# Altium PCB 机载动力寻优.PcbDoc
Units mil, origin at the board's own origin, x right, y up, seen from the top; angles counter-clockwise.
Board outline 4527.56 x 2952.76 mil, 2 copper layers (Top Layer, Bottom Layer); 38 components, 125 nets, 247 pads, 70 vias.
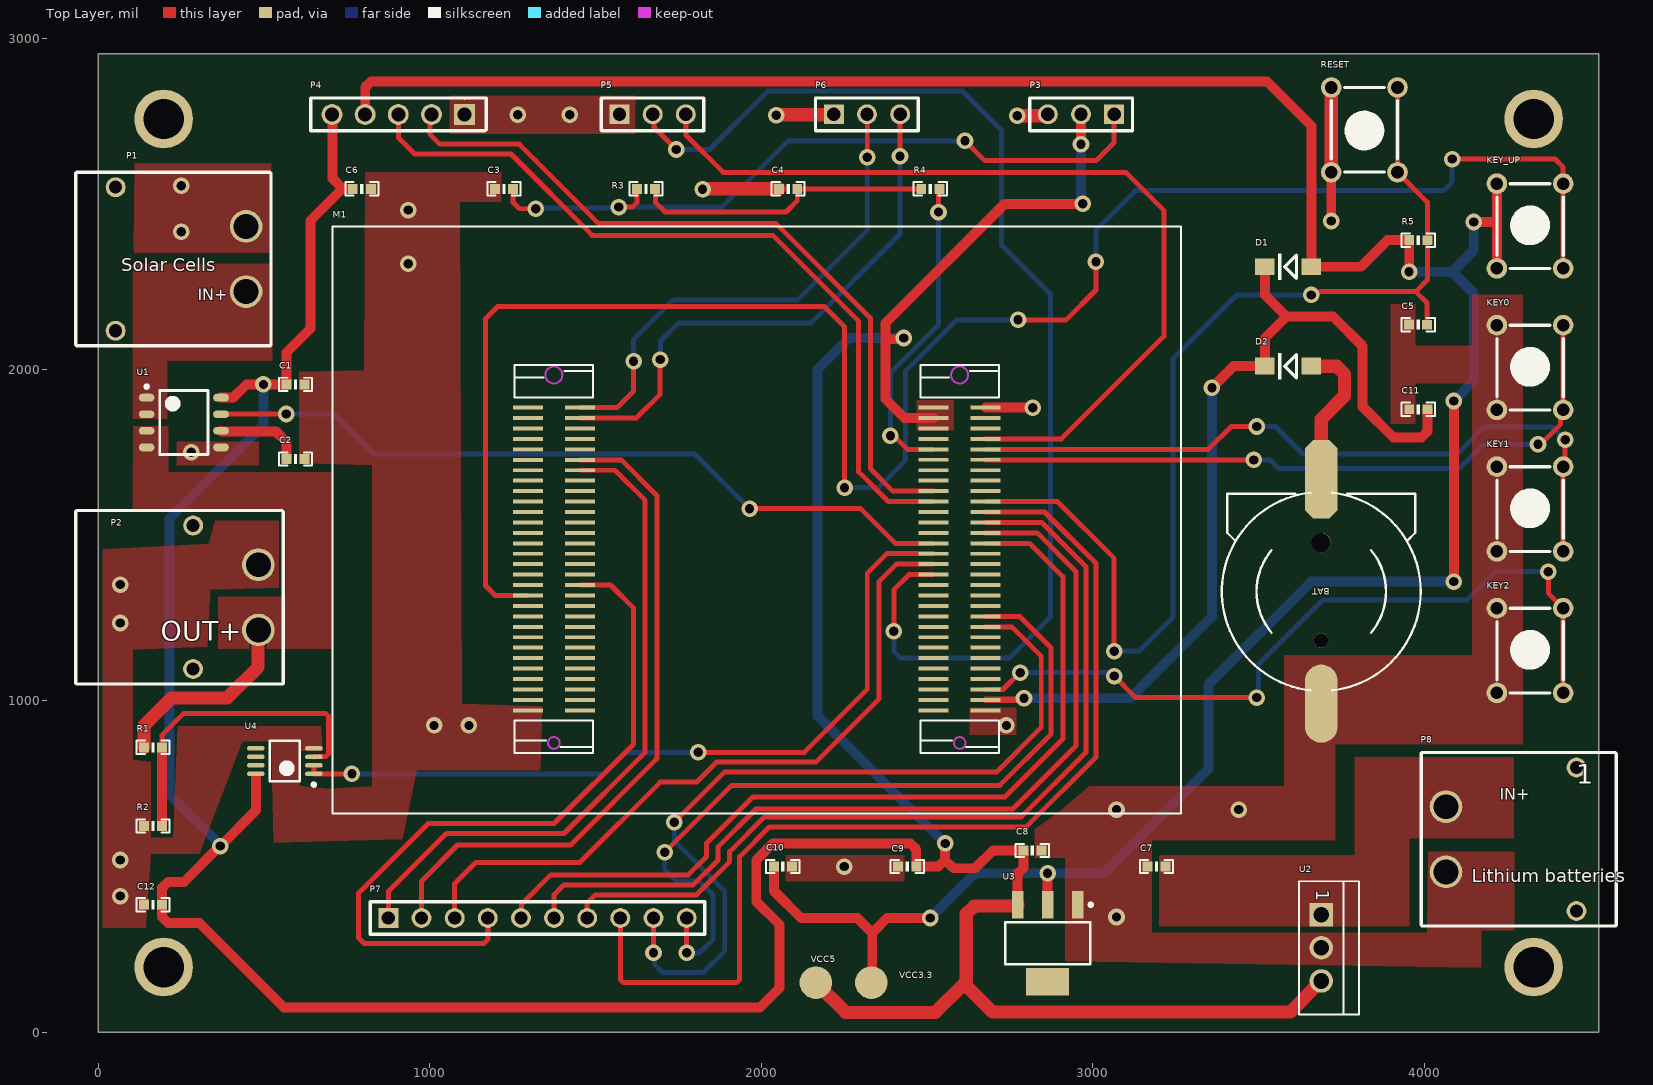
[diagram p0: Top Layer view]
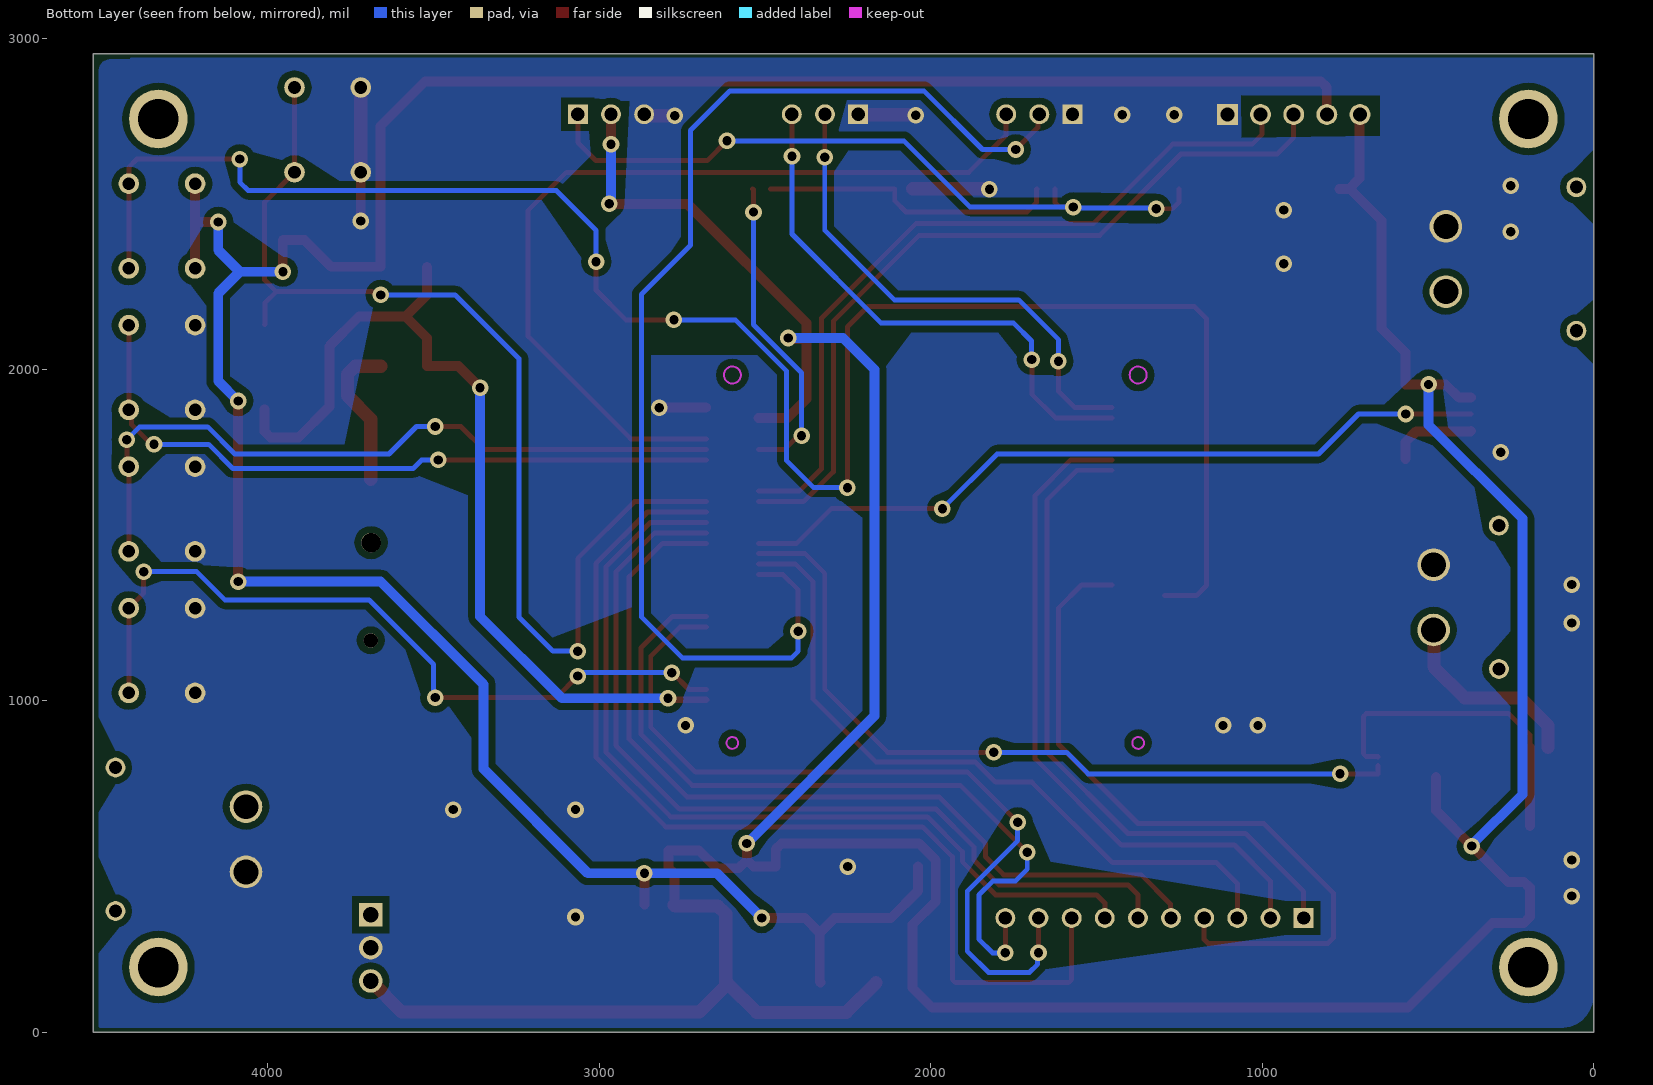
[diagram p1: Bottom Layer view, seen from below]

## Layer stack, top to bottom
Top Solder: solder mask 0.4, Solder Resist, Dk 3.5
Top Layer: signal copper 1.4
Dielectric 1: dielectric 12.6, FR-4, Dk 4.8
Bottom Layer: signal copper 1.4
Bottom Solder: solder mask 0.4, Solder Resist, Dk 3.5

## Board outline
0,0 0,2952.76 4527.56,2952.76 4527.56,0

## Design rules (kind name [scope] priority, off if disabled: settings)
Clearance [All] p1: gap=6 ignorepadtopadclearanceinfootprint=FALSE
FabricationTestpoint [All] p1: side=3 testpointundercomponent=TRUE minsize=40 maxsize=196.85 preferedsize=60 minholesize=0 maxholesize=40 preferedholesize=32 testpointgrid=1 allowsidetop=TRUE allowsidebottom=TRUE usegrid=TRUE gridtolerance=0.01
HoleSize [All] p1: absolutevalues=TRUE maxlimit=200 minlimit=1 maxpercent=80.000 minpercent=20.000
MinimumSolderMaskSliver [All] p1: minsoldermaskwidth=2
PolygonConnect [All] p1: connectstyle=Direct reliefconductorwidth=10 reliefentries=4 polygonreliefangle="90 Angle" airgapwidth=10
RoutingVias [All] p1: holewidth=28 width=50 viastyle="Through Hole" minholewidth=28 minwidth=50 maxholewidth=28 maxwidth=50
SilkToSilkClearance [All] p1: silktosilkclearance=4
SilkToSolderMaskClearance [IsPad] p1: minsilkscreentomaskgap=2 clearancetoexposedcopper=TRUE
SolderMaskExpansion [All] p1: expansion=4 istentingtop=FALSE
Width PWR [InNetClass('PWR')] p1: maxlimit=60 minlimit=20 preferedwidth=30
Width [All] p2: maxlimit=60 minlimit=15 preferedwidth=15
25 further rules are at their usual default settings.

## Classes and differential pairs
net class PWR: GND VBAT VCC3.3 VCC5 VREF+
component class 机载动力寻优: BAT C1 C3 C4 C5 C6 C8 C9 C10 C11 C12 D1 D2 KEY0 KEY1 KEY2 KEY_UP M1 P1 P3 P4 P5 P6 P7 P8 R1 R2 R3 R4 R5 RESET U2 U3 U4

## Components (designator, comment, footprint, x,y, rotation, side; value= is the part's Value field where it differs from the comment)
BAT "BATT" BATM 3690,1330 r180 top
C1 "0.1uF" 0603P 595,1955 r180 top
C2 "1nF" 0603P 595,1730 r180 top
C3 "100pF" 0603P 1223.75,2545.13 r0 top
C4 "1000pF" 0603P 2081.25,2545.13 r0 top
C5 "100nF" 0603P 3982.5,2135.03 r180 top
C6 "100nF" 0603P 795,2545 r180 top
C7 "0.33uF" 0603P 3192.5,499.94 r180 top
C8 "0.1uf" 0603P 2818,549 r0 top
C9 "10uF" 0603P 2440.83,499.94 r180 top
C10 "22uF" 0603P 2065,500.06 r0 top
C11 "100nF" 0603P 3982.5,1880 r0 top
C12 "0.1uF" 0603P 165,385 r0 top
D1 "1N4148" DIODE_SOP 3660,2310 r180 top
D2 "1N4148" DIODE_SOP 3660,2010 r180 top
KEY0 "KEY_M" KEY_M 4220,1878.03 r90 top
KEY1 "KEY_M" KEY_M 4220,1451.06 r90 top
KEY2 "KEY_M" KEY_M 4220,1024.09 r90 top
KEY_UP "KEY_M" KEY_M 4220,2305 r90 top
M1 "STM32F4&F7_CB" STM32F4&F7_CB 2677.48,1885 r180 top
P1 "XT30PW-M" XT30PW-M 445.7,2333.46 r90 top
P2 "XT30PW-F" XT30PW-F 482.85,1312.46 r90 top
P3 "Header 3" 串口 2965,2770 r180 top
P4 "Header 5" 串口数据记录仪 905,2769.21 r180 top
P5 "Header 3" 串口 1672.57,2770 r0 top
P6 "Header 3" 串口 2319.24,2770 r0 top
P7 "Header 10" IO口 1325,345 r0 top
P8 "XT30M-Bat" XT30PW-M 4066.3,582.46 r270 top
R1 "9K" 0603P 165,860 r0 top
R2 "1K" 0603P 165,622.44 r180 top
R3 "47K" 0603P 1652.5,2545.13 r0 top
R4 "4.7K" 0603P 2510,2545.13 r0 top
R5 "10K" 0603P 3982.5,2390.06 r0 top
RESET "KEY_M" KEY_M 3920,2850.91 r270 top
U1 "ACS712" ACS712 257.8,1840 r0 top
U2 "L7805CV" TO-220-3 3690,255 r270 top
U3 "AMS1117-3.3" SOT-223 2864.45,268.86 r270 top
U4 "OPA" OPA 562.6,818.39 r180 top

## Footprints (in the part's own frame and the unit in brackets; to place one, negate y for a bottom-side part, rotate by r counter-clockwise, add the part's x,y. Pads: shape width x height; smd on the part's side, far side on the other; paste and mask are expansions set on the pad)
0603P [mil]
  rect 30x30 smd: 1(-27,0) 2(27.5,-0.06)
  silkscreen extent -50,-20 50,20
ACS712 [mm] "SOIC, 8-Leads, Body 4.90x3.90mm, Pitch 1.27mm, IPC Medium Density"
  oval 1.2x0.6 smd: 1(-2.85,1.905) 2(-2.85,0.635) 3(-2.85,-0.635) 4(-2.85,-1.905) 5(2.85,-1.905) 6(2.85,-0.635) 7(2.85,0.635) 8(2.85,1.905)
  silkscreen extent -2.97,-2.45 1.85,2.88, body extent -1.95,-2.45 1.95,2.45, height 1.62
BATM [mm]
  round 1.1 hole 1.1 unplated: 0(0,3.748)
  round 1.5 hole 1.5 unplated: 0(0.025,-3.752)
  oct 2.5x6 smd: 1(0,-8.602)
  oval 2.5x6 smd: 2(0,8.598)
  silkscreen extent -7.62,-7.58 7.62,7.57
DIODE_SOP [mm]
  rect 1.5x1.3 smd: 1(0,0) 2(3.556,0)
  silkscreen extent 1.14,-1.02 2.56,1.02
IO口 [mil]
  rect 60x60 hole 40.16: 1(-450,0)
  round 60 hole 40.16: 2(-350,0) 3(-250,0) 4(-150,0) 5(-50,0) 6(50,0) 7(150,0) 8(250,0) 9(350,0) 10(450,0)
  silkscreen extent -505,-49 504,49
KEY_M [mil]
  round 62 hole 38: 1(0,0) 1(255.91,0) 2(0,-200) 2(255.91,-200)
  silkscreen extent 0,-200 255,0
OPA [mm] "TSOP, 8-Leads, Body 3.00x3.00mm, Pitch 0.65mm, IPC Medium Density"
  oval 1.35x0.35 smd: 1(-2.225,0.975) 2(-2.225,0.325) 3(-2.225,-0.325) 4(-2.225,-0.975) 5(2.225,0.975) 6(2.225,0.325) 7(2.225,-0.325) 8(2.225,-0.975)
  silkscreen extent -2.35,-1.55 1.15,1.92, body extent -1.55,-1.55 1.55,1.55, height 1.1
SOT-223 [mm] "SOT223, 4-Leads, Body 6.20x7.00mm (avg), Pitch 2.30mm, IPC Medium Density"
  rect 2.1x0.9 smd: 1(-2.95,2.3) 2(-2.95,0) 3(-2.95,-2.3)
  rect 2.1x3.3 smd: 4(2.95,0)
  silkscreen extent -3.07,-3.25 1.6,3.43, body extent -3.5,-3.25 3.5,3.25, height 1.8
STM32F4&F7_CB [mm]
  rect 2.3x0.3 smd: J1_1(0,0) J1_2(0,0.8) J1_3(0,1.6) J1_4(0,2.4) J1_5(0,3.2) J1_6(0,4) J1_7(0,4.8) J1_8(0,5.6) J1_9(0,6.4) J1_10(0,7.2) J1_11(0,8) J1_12(0,8.8) J1_13(0,9.6) J1_14(0,10.4) J1_15(0,11.2) J1_16(0,12) J1_17(0,12.8) J1_18(0,13.6) J1_19(0,14.4) J1_20(0,15.2) J1_21(0,16) J1_22(0,16.8) J1_23(0,17.6) J1_24(0,18.4) J1_25(0,19.2) J1_26(0,20) J1_27(0,20.8) J1_28(0,21.6) J1_29(0,22.4) J1_30(0,23.2) J1_31(4,23.2) J1_32(4,22.4) J1_33(4,21.6) J1_34(4,20.8) J1_35(4,20) J1_36(4,19.2) J1_37(4,18.4) J1_38(4,17.6) J1_39(4,16.8) J1_40(4,16) J1_41(4,15.2) J1_42(4,14.4) J1_43(4,13.6) J1_44(4,12.8) J1_45(4,12) J1_46(4,11.2) J1_47(4,10.4) J1_48(4,9.6) J1_49(4,8.8) J1_50(4,8) J1_51(4,7.2) J1_52(4,6.4) J1_53(4,5.6) J1_54(4,4.8) J1_55(4,4) J1_56(4,3.2) J1_57(4,2.4) J1_58(4,1.6) J1_59(4,0.8) J1_60(4,0) J2_1(31.1,0.001) J2_2(31.1,0.801) J2_3(31.1,1.601) J2_4(31.1,2.401) J2_5(31.1,3.201) J2_6(31.1,4.001) J2_7(31.1,4.801) J2_8(31.1,5.601) J2_9(31.1,6.401) J2_10(31.1,7.201) J2_11(31.1,8.001) J2_12(31.1,8.801) J2_13(31.1,9.601) J2_14(31.1,10.401) J2_15(31.1,11.201) J2_16(31.1,12.001) J2_17(31.1,12.801) J2_18(31.1,13.601) J2_19(31.1,14.401) J2_20(31.1,15.201) J2_21(31.1,16.001) J2_22(31.1,16.801) J2_23(31.1,17.601) J2_24(31.1,18.401) J2_25(31.1,19.201) J2_26(31.1,20.001) J2_27(31.1,20.801) J2_28(31.1,21.601) J2_29(31.1,22.401) J2_30(31.1,23.201) J2_31(35.1,23.201) J2_32(35.1,22.401) J2_33(35.1,21.601) J2_34(35.1,20.801) J2_35(35.1,20.001) J2_36(35.1,19.201) J2_37(35.1,18.401) J2_38(35.1,17.601) J2_39(35.1,16.801) J2_40(35.1,16.001) J2_41(35.1,15.201) J2_42(35.1,14.401) J2_43(35.1,13.601) J2_44(35.1,12.801) J2_45(35.1,12.001) J2_46(35.1,11.201) J2_47(35.1,10.401) J2_48(35.1,9.601) J2_49(35.1,8.801) J2_50(35.1,8.001) J2_51(35.1,7.201) J2_52(35.1,6.401) J2_53(35.1,5.601) J2_54(35.1,4.801) J2_55(35.1,4.001) J2_56(35.1,3.201) J2_57(35.1,2.401) J2_58(35.1,1.601) J2_59(35.1,0.801) J2_60(35.1,0.001)
  Keep-Out Layer circle w0.152: c33.1,25.701 r0.45
  Keep-Out Layer circle w0.152: c33.1,-2.499 r0.65
  Keep-Out Layer circle w0.152: c2,-2.5 r0.65
  Keep-Out Layer circle w0.152: c2,25.7 r0.45
  silkscreen extent -14.95,-13.87 50.05,31.13
TO-220-3 [mm]
  rect 1.8x1.8 hole 1.2: 1(-2.54,0)
  round 1.8 hole 1.2: 2(0,0) 3(2.54,0)
  silkscreen extent -5.1,-1.7 5.1,2.9
XT30PW-F [mm]
  round 2.5 hole 1.9: 1(-2.5,0) 2(2.5,0)
  round 1.524 hole 1: ""(-5.489,5.005) ""(5.5,5)
  silkscreen extent -6.64,-1.91 6.65,14
XT30PW-M [mm]
  round 2.5 hole 1.9: 1(-2.5,0) 2(2.5,0)
  round 1.524 hole 1: ""(-5.5,10) ""(5.5,10)
  silkscreen extent -6.65,-1.91 6.65,13.05
串口 [mil]
  rect 60x60 hole 40.16: 1(-100,0)
  round 60 hole 40.16: 2(0,0) 3(100,0)
  silkscreen extent -155,-49 154,49
串口数据记录仪 [mm]
  rect 1.6x1.6 hole 1.07: 1(-5.08,0)
  round 1.6 hole 1.07: 2(-2.54,0) 3(0,0) 4(2.54,0) 5(5.08,0)
  silkscreen extent -6.73,-1.27 6.71,1.25

## Part data
BAT: library part BAT, "电源"
C1 C2 C3 C4 C5 C6 C11: library part C
C7 C8 C9 C10 C12: library part CAP, "电容"
D1 D2: library part D, "二极管"
M1: "F429/746 Core Board"
P3 P5 P6: "Header, 3-Pin", LatestRevisionDate=17-Jul-2002, LatestRevisionNote="Re-released for DXP Platform.", Publisher="Altium Limited"
P4: "Header, 5-Pin", LatestRevisionDate=17-Jul-2002, LatestRevisionNote="Re-released for DXP Platform.", Publisher="Altium Limited"
P7: "Header, 10-Pin", LatestRevisionDate=17-Jul-2002, LatestRevisionNote="Re-released for DXP Platform.", Publisher="Altium Limited"
P8: library part XT30, "公头"
R1 R2 R3 R4 R5: library part R
U2 U3: "IC"
U4: "运放器"

## Free pads (board coordinates)
  round 177.17 hole 122.05: 14(196.85,196.85) 14(196.85,2755.91) 14(4330.71,196.85) 14(4330.71,2755.91)
  round 98.43 smd: 18(2332.5,150) 19(2165,150)

## Via types
v1: diameter 50, hole 28, Top Layer to Bottom Layer, 70 vias

## Nets (pads, with @x,y where several pads share a name; then routed paths per layer and width w, separated by ;. In a path a pad name is that pad's centre, name@x,y a point inside that pad or via, vN(x,y) a via of type N, cw(c..) or ccw(c..) an arc to the next point about the centre after c; other vN are vias at no path point)
1WIRE_DQ: M1.J2_4
BOOT0: M1.J1_31
BOOT1: M1.J1_55
DCMI_D0: M1.J2_16
DCMI_D1: M1.J2_17
DCMI_D2: M1.J2_18 P7.4 | length 2219.1
  Top Layer w15: P7.4 1175,280 1163,268 802,268 785,285 785,420 995,630 1375,630 1615,870 1615,1280 1545.47,1349.53 M1.J2_18
DCMI_D3: M1.J2_19
DCMI_D4: M1.J1_39
DCMI_D5: M1.J1_36
DCMI_D6: M1.J1_26
DCMI_D7: M1.J1_27
DCMI_HREF: M1.J2_3
DCMI_PCLK: M1.J1_47 U1.7 | length 2311.9
  Top Layer w15: U1.7 566.25,1865 v1(567,1865.75) ; v1(1965,1580) 2300,1580 2404.45,1475.55 M1.J1_47
  Bottom Layer w15: v1(567,1865.75) 709.25,1865.75 830,1745 1800,1745 v1(1965,1580)
DCMI_RESET: M1.J1_41
DCMI_SCL: M1.J1_22 P7.9 | length 2486.3
  Top Layer w15: v1(1675,240) P7.9 ; v1(1738,634) 1889,785 2710,785 2845,920 2845,1135 2756.42,1223.58 M1.J1_22
  Bottom Layer w15: v1(1675,240) 1677.59,237.41 1677.59,205.41 1702,181 1826,181 1890,245 1890,426 1738,578 v1(1738,634)
DCMI_SDA: M1.J1_21 P7.10 | length 2374.8
  Top Layer w15: v1(1709,543) 1911,745 2720,745 2875,900 2875,1159.5 2779.42,1255.08 M1.J1_21 ; v1(1775,240) P7.10
  Bottom Layer w15: v1(1709,543) 1709,492 1745,456 1813.08,456 1855,414.08 1855,281 1814,240 v1(1775,240)
DCMI_VSYNC: M1.J1_25
DCMI_XCLK: M1.J2_20
ETH_MDC: M1.J1_9
ETH_MDIO: M1.J1_4 P5.3 | length 2644.9
  Top Layer w15: P5.3 1772.57,2707.43 1885,2595 3100,2595 3215,2480 3215,2100 2905.51,1790.51 M1.J1_4
FMC_A16_CLE: M1.J2_23
FMC_A17_ALE: M1.J2_21
FMC_A18: M1.J2_14
FMC_D0: M1.J2_45
FMC_D1: M1.J2_46
FMC_D2: M1.J2_47
FMC_D3: M1.J2_48
FMC_D4: M1.J2_49
FMC_D5: M1.J2_50
FMC_D6: M1.J2_51
FMC_D7: M1.J2_52
FMC_D8: M1.J2_53
FMC_D9: M1.J2_54
FMC_D10: M1.J2_55
FMC_D11: M1.J2_56
FMC_D12: M1.J2_57
FMC_D13: M1.J2_58
FMC_D14: M1.J2_59
FMC_D15: M1.J2_60
FMC_NBL0: M1.J2_43
FMC_NBL1: M1.J2_44
FMC_NE1: M1.J1_35
FMC_NOE: M1.J2_26
FMC_NWAIT: M1.J2_27
FMC_NWE: M1.J2_22
GBC_KEY: M1.J1_15
GBC_LED: M1.J1_45 P7.3 | length 2156.1
  Top Layer w15: P7.3 1075,449 1137.81,511.81 1451.81,511.81 1695,755 1805,755 1865,815 2165,815 2355,1005 2355,1360 2407.56,1412.56 M1.J1_45
GND: BAT.2 C1.1 C2.1 C3.1 C4.1 C5.2 C6.1 C7.2 C8.2 C9.2 C10.2 C11.1 C12.1 KEY0.1 KEY1.1 KEY2.1 M1.J1_1 M1.J1_30 M1.J2_31 P1.2 P2.2 P3.3 P4.1 P5.1 P6.1 P8.2 R2.2 RESET.2 U1.5 U2.2 U3.1 U4.4 | length 1047.5
  Top Layer w30: v1(1823,2544) cw(c1825.72,2541.28) v1@1825.72,2545.13 ; M1.J1_1 2818.82,1885 v1(2819.41,1884.41) ; v1(3720,2448) RESET.2@3720,2595
  Top Layer w40: v1@1825.72,2545.13 C4.1 ; v1(2045.55,2767.45) 2046.83,2768.72 2217.96,2768.72 P6.1 ; v1(2773,2766) 2855,2766 2858,2763 P3.3 ; RESET.2@3720,2595 RESET.2@3720,2850.91
  other v1: 3072,348 66,411 2251,500 66,520 3072,672 3441,672 1013,926 1118,926 2740,926 66,1235 66,1351 280,1750 935,2319 250,2416 935,2481 250,2554 1265,2769 1422,2769
IIC_SCL: M1.J1_8
IIC_SDA: M1.J1_7
IP+: P1.1 U1.1 U1.2
IP-: P2.1 R1.1 U1.3 U1.4 | length 595.3
  Top Layer w15: P2.1@482,1213.19 P2.1
  Top Layer w40: R1.1 138,926 221,1009 389,1009 482,1102 P2.1@482,1213.19
JTCK: M1.J1_42
JTMS: M1.J1_43
KEY0: KEY0.2 M1.J1_6 | length 2103.8
  Top Layer w15: M1.J1_6 3485.48,1727.52 v1(3486,1727) ; v1(4344,1774) 4351.9,1774 4411.19,1833.29 4411.19,1869.22 4420,1878.03 KEY0.2@4420,2133.94
  Bottom Layer w15: v1(3486,1727) 3486.09,1726.91 3536.09,1726.91 3562,1701 4106,1701 4179,1774 v1(4344,1774)
KEY1: KEY1.2 M1.J1_5 | length 2201
  Top Layer w15: M1.J1_5 3349.02,1759.02 3418,1828 v1(3495,1828) ; KEY1.2@4420,1451.06 4420,1706.97 4426,1712.97 v1(4426,1788)
  Bottom Layer w15: v1(3495,1828) 3552,1828 3635,1745 4100,1745 4182,1827 4387,1827 v1(4426,1788)
KEY2: KEY2.2 M1.J1_28 | length 2347.1
  Top Layer w15: M1.J1_28 2729.61,1034.61 2780,1085 v1(2782,1085) ; v1(3065,1075) 3130,1010 v1(3495,1010) ; v1(4375,1390) 4375,1325 4420,1280 KEY2.2@4420,1024.09
  Bottom Layer w15: v1(2782,1085) 3045.53,1085 3055.53,1075 v1(3065,1075) ; v1(3495,1010) 3500.02,1015.02 3500.02,1110.02 3695,1305 4130,1305 4215,1390 v1(4375,1390)
LCD_B3: M1.J2_35
LCD_B4: M1.J2_36
LCD_B5: M1.J2_37
LCD_B6: M1.J2_38
LCD_B7: M1.J2_39
LCD_BL: M1.J1_23
LCD_G2: M1.J2_30
LCD_G3: M1.J2_29
LCD_G4: M1.J2_28
LCD_G5: M1.J2_34
LCD_G6: M1.J2_33
LCD_G7: M1.J2_32
LCD_R3: M1.J2_10
LCD_R4: M1.J2_11
LCD_R5: M1.J2_12
LCD_R6: M1.J2_24
LCD_R7: M1.J2_15
LED0: M1.J1_57
LED1: M1.J1_56 R4.2 | length 953.1
  Top Layer w15: v1(2390,1800) 2400,1800 2440.98,1759.02 M1.J1_56 ; v1(2535,2475) 2535,2542.56 R4.2
  Bottom Layer w15: v1(2390,1800) 2390,1990 2535,2135 v1(2535,2475)
NetBAT_1: BAT.1 D2.1 | length 456.6
  Top Layer w40: D2.1 3736.57,2010 3760,1986.57 3760,1920 3690,1850 BAT.1
NetC2_2: C2.2 U1.6 | length 262.7
  Top Layer w30: U1.6 371.5,1813.5 535.28,1813.5 567.5,1781.28 C2.2
NetC3_2: C3.2 P3.1 R3.1 | length 2182.1
  Top Layer w15: C3.2 1251.25,2504.46 1270.71,2485 v1(1320,2485) ; v1(1570,2490) 1610.98,2490 1625.5,2504.52 R3.1 ; v1(2615,2690) 2675,2630 3010,2630 3065,2685 P3.1
  Bottom Layer w15: v1(1320,2485) 1322.5,2487.5 1567.5,2487.5 v1(1570,2490) 1881.21,2490 2081.21,2690 v1(2615,2690)
NetC4_2: C4.2 R3.2 R4.1 | length 905.8
  Top Layer w15: R3.2 1680.59,2544.47 1680.59,2504.41 1710,2475 2075,2475 2108.75,2508.75 C4.2 ; C4.2 R4.1
NetC7_1: C7.1 P8.1 U2.1
NetR1_2: R1.2 R2.1 U4.3 | length 968.8
  Top Layer w15: R1.2 192.5,897.5 256.5,961.5 686.21,961.5 695,952.71 695,840.58 686.21,831.79 650.81,831.79 U4.3
  Top Layer w30: R2.1 192.5,622.94 R1.2
NRF_CE: M1.J2_25
NRF_CS: M1.J1_34
PA0: KEY_UP.2 M1.J2_42 | length 5753.5
  Top Layer w15: M1.J2_42 1197.97,1318.03 1168,1348 1168,2153 1205,2190 2190,2190 2251.48,2128.52 v1(2251.48,1643.52) ; v1(2775,2150) 2920,2150 3010,2240 v1(3010,2325) ; v1(4085,2635) 4395,2635 4420,2610 4420,2560.91 KEY_UP.2@4420,2305
  Bottom Layer w15: v1(2251.48,1643.52) 2353.52,1643.52 2435,1725 2435,1995 2590,2150 v1(2775,2150) ; v1(3010,2325) 3010,2420 3130,2540 4060,2540 4085,2565 v1(4085,2635)
PA1: M1.J1_3
PA3: M1.J1_44 P5.2 | length 3626.5
  Top Layer w15: P5.2 1677.22,2765.35 1677.22,2730.4 v1(1743.81,2663.81) ; v1(2400,1210) 2400,1335 2446.06,1381.06 M1.J1_44
  Bottom Layer w15: v1(1743.81,2663.81) 1843.81,2663.81 2021,2841 2605.75,2841 2725,2721.75 2725,2375 2873.5,2226.5 2873.5,1253.5 2750,1130 2420,1130 2400,1150 v1(2400,1210)
PA5: M1.J1_46 U4.1 U4.2 | length 2375.5
  Top Layer w15: U4.2 U4.1 v1(765,780) ; v1(1810,845) 2130,845 2320,1035 2320,1385 2379.06,1444.06 M1.J1_46
  Bottom Layer w15: v1(765,780) 1525,780 1590,845 v1(1810,845)
PA7: M1.J1_48
PA9: M1.J1_51 P4.3 | length 2405.7
  Top Layer w15: P4.3 905,2700 955,2650 1245,2650 1490,2405 2035,2405 2294,2146 2294,1691 2383.46,1601.54 M1.J1_51
PA10: M1.J1_52 P4.2 | length 2293.9
  Top Layer w15: P4.2 1000,2764.21 1000,2710 1030,2680 1270,2680 1320,2630 1510,2440 2045,2440 2330,2155 2330,1700 2396.97,1633.03 M1.J1_52
PA11: M1.J1_53
PA12: M1.J1_54
PB6: M1.J1_24
PB10: M1.J2_2 P6.3 | length 1656.1
  Top Layer w15: M1.J2_2 1623.47,1853.47 1695,1925 v1(1695,2030) ; v1@2418.75,2638.53 2418.75,2769.51 P6.3
  Bottom Layer w15: v1(1695,2030) 1696.09,2031.09 1696.09,2086.09 1750,2140 2150,2140 2418.75,2408.75 v1(2418.75,2643.75)
PB11: M1.J2_1 P6.2 | length 1530.1
  Top Layer w15: M1.J2_1 M1.J2_1 1565,1885 1615,1935 v1(1615,2025) ; P6.2 2320,2769.24 v1(2320,2640)
  Bottom Layer w15: v1(1615,2025) 1614.39,2025.61 1614.39,2089.39 1735,2210 2110,2210 2320,2420 v1(2320,2640)
PB13: M1.J2_5
PB14: M1.J2_6 P7.2 | length 2045.4
  Top Layer w15: P7.2 975,456.21 1083.79,565 1425,565 1685,825 1685,1620 1577.52,1727.48 M1.J2_6
PB15: M1.J2_7 P7.1 | length 2023.6
  Top Layer w15: P7.1 875,425 1050,600 1405,600 1650,845 1650,1605 1559.01,1695.99 M1.J2_7
PC4: M1.J1_49
PC5: M1.J1_50
PC10: M1.J1_40
PC12: M1.J1_38
PD2: M1.J1_37
PE2: M1.J1_20
PE3: M1.J1_19
PE4: M1.J1_18
PE5: M1.J1_17
PE6: M1.J1_16
PF6: M1.J1_14 P7.5 | length 2669.7
  Top Layer w15: P7.5 1277.12,347.12 1277.12,387.12 1365,475 1780,475 1835,530 1835,570 1975,710 2735,710 2910,885 2910,1375 2809.45,1475.55 M1.J1_14
PF7: M1.J1_13 P7.6 | length 2700.7
  Top Layer w15: P7.6 1375,415 1405,445 1795,445 1870,520 1870,559.7 1984.3,674 2759,674 2950,865 2950,1390 2832.95,1507.05 M1.J1_13
PF8: M1.J1_12 P7.7 | length 2673.9
  Top Layer w15: P7.7 1475,390 1500,415 1805,415 1905,515 1905,545 2010,650 2785,650 2980,845 2980,1405 2846.46,1538.54 M1.J1_12
PF9: M1.J1_11 P7.8 | length 3105.7
  Top Layer w15: P7.8 1575,158.79 1583.79,150 1926.21,150 1935,158.79 1935,530 2025,620 2800,620 3010,830 3010,1415 2854.96,1570.04 M1.J1_11
PG3: M1.J2_13
PG13: M1.J1_33
PG14: M1.J1_32
PH6: M1.J2_8
PH7: M1.J2_9
PI3: M1.J2_41
PI8: M1.J2_40
RESET: C5.1 M1.J1_10 R5.2 RESET.1 | length 3337.6
  Top Layer w15: M1.J1_10 2893.46,1601.54 3065,1430 v1(3065,1150) ; v1(3660,2225) 3666.7,2231.7 3682.98,2231.7 3686.29,2235 3975,2235 ; RESET.1@3920,2850.91 3920,2595 4010,2505 R5.2 4010,2270 3975,2235 ; C5.1@4010,2135.53 C5.1 4009.5,2200.5 3975,2235
  Bottom Layer w15: v1(3065,1150) 3140,1150 3243.15,1253.15 3243.15,2033.15 3435,2225 v1(3660,2225)
VBAT: C11.2 D1.2 D2.2 M1.J1_29 | length 2775.4
  Top Layer w20: M1.J1_29 2788.11,1003.11 v1(2793,1008)
  Top Layer w30: v1(3360,1945) 3425,2010 D2.2 3520,2095 3585,2160 ; D1.2 3520,2225 3585,2160 ; C11.2 4010,1812.57 3992.43,1795 3907.43,1795 3815,1887.43 3815,2070 3725,2160 3585,2160
  Bottom Layer w30: v1(2793,1008) 3113,1008 3360,1255 v1(3360,1945)
VCC3.3: C10.1 D1.1 KEY_UP.1 P4.4 pad.18 R5.1 U3.2 | length 8495.2
  Top Layer w30: P4.4 805.2,2769.41 805.2,2851.43 822.77,2869 3526,2869 3660,2735 D1.1 3810,2310 3890.06,2390.06 R5.1 3955.5,2295.5 v1(3955,2295) ; C10.1 2038,427 2120,345 2290,345 2335,300 ; pad.18 2335,152.5 2335,300 ; v1(2510,345) 2380,345 2335,300 ; U3.2 2864,385.45 v1(2864,480) 2864,467 v1@2865,466 ; v1(4090,1360) v1(4090,1905) ; v1(4150,2445) 4220,2445 ; KEY_UP.1@4220,2305 4220,2445 ; KEY_UP.1@4220,2560.91 4220,2445
  Bottom Layer w30: v1(2510,345) 2645,480 3035,480 3350,795 3350,1050 3660,1360 v1(4090,1360) ; v1(3955,2295) 4085,2295 ; v1(4090,1905) 4150,1965 4150,2230 4085,2295 ; v1(4150,2445) 4150,2360 4085,2295
VCC5: C1.2 C6.2 C8.1 C9.1 C12.2 M1.J1_58 M1.J1_59 M1.J1_60 P3.2 P4.5 pad.19 U1.8 U2.3 U3.3 U4.5 | length 12264.9
  Top Layer w30: U1.8 407,1915 447,1955 v1(498,1955) ; 475,770 475,669 v1(368,562) 366,562 258,454 210.07,454 192.5,436.43 C12.2 192.5,347.57 210.07,330 305,330 560,75 1996.66,75 2055,133.34 2055,325 1985,395 1985,520 2035,570 2450.26,570 2467.83,552.43 C9.1 2534.94,499.94 2555,520 ; v1@498,1955.06 C1.2 567.5,2051.5 640,2124 640,2450 735.06,2545.06 ; P4.5 707,2767.21 707,2576 737.94,2545.06 C6.2 ; pad.19@2165,149.42 pad.19 ; v1(2430,2095) 2426.17,2091.17 2376.17,2091.17 2375,2090 ; M1.J1_59 2432.5,1853.5 2375,1911 2375,2090 ; v1(2555,570) 2555,520 ; U3.3 2774,385.1 2774,479 2791,496 C8.1 2699,549 2645,495 2580,495 2555,520 ; v1(2965,2680) 2965,2760 2960,2765 P3.2 ; v1(2970,2500) 2735,2500 2375,2140 2375,2090
  Top Layer w40: pad.19@2165,149.42 2254.42,60 2525,60 2612,147 ; U3.3 2773.9,383.28 2771.61,381 2642.43,381 2619,357.57 2619,154 2612,147 ; U2.3 3596,61 2698,61 2612,147
  Bottom Layer w30: v1(368,562) 368,565 215,718 215,1549.92 498,1832.92 v1(498,1955) ; v1(2430,2095) 2265,2095 2170,2000 2170,955 v1(2555,570) ; v1(2965,2680) 2965,2505 v1(2970,2500)
VREF+: M1.J1_2
pads on no net: BAT.0 P1. P2. P8. U3.4 U4.6 U4.7 U4.8

## Polygon pours and split planes (outlines as drawn)
VCC5 on Top Layer "VCC5_L01_P070" (solid, remove dead copper, pour order 70): 2469,1813 2581,1813 2581,1907 2469,1907
GND on Top Layer "GND_L01_P061" (solid, remove dead copper, pour order 61): 109.49,2623 521,2623 521,2353 106.49,2353
IP- on Top Layer "IP-_L01_P058" (solid, remove dead copper, pour order 58): 105,1828 211,1828 211,1690 705,1690 705,1158 362,1158 362,1315 565,1315 565,1579 103.82,1579
GND on Top Layer "GND_L01_P069" (solid, remove dead copper, pour order 69): 2074,535 2432,535 2432,456 2074,456
GND on Top Layer "GND_L01_P062" (solid, remove dead copper, pour order 62): 544,1341 544,1543 352,1543 333,1474 13.87,1458 13.87,315.04 143.04,315.04 157.92,538.38 303.61,538.5 434.12,878 522,878 529.7,572.3 917,582 961,791 1333,791 1340,984 1096,991 1090,2506 1216,2506 1216,2594.64 805,2594.64 802,1998 606,1993.27 606,1717.51 826.06,1710.79 826.06,742.56 691.77,734.36 606,743.67 606,849 677,849 671,924 240,924 225.45,587 157.92,587 157.92,815.97 103,822 103,1154 328,1163.07 337,1336
GND on Top Layer "GND_L01_P066" (solid, remove dead copper, pour order 66): 4013,545 4272,545 4272,308 4173,308 4173,195.48 2917,214.48 2917,527 2825,527 2825,612 2900,666 2990,742 3578,742 3578,1137 4145,1137 4145,1959 3973,1959 3973,1836 3899,1836 3899,2197 3973,2197 3973,2071 4145,2071 4145,2225 4298,2225 4298,869.3 3732,869.3 3732,579 3179,579 3179,300 4009.16,300
GND on Top Layer "GND_L01_P064" (solid, remove dead copper, pour order 64): 2630,979 2630,898 2769,898 2769,979
GND on Top Layer "GND_L01_P063" (solid, remove dead copper, pour order 63): 236,1783 236,1711 484,1711 484,1782
GND on Top Layer "GND_L01_P060" (solid, remove dead copper, pour order 60): 1060,2826 1620,2826 1620,2711 1060.95,2711
NetC7_1 on Top Layer "NETC7_1_L01_P059" (solid, remove dead copper, pour order 59): 3200.5,535 3791,535 3791,830 4271,830 4271,586 3956,586 3956,320 3201.47,320
IP+ on Top Layer "IP+_L01_P057" (solid, remove dead copper, pour order 57): 104,2319 524,2319 524,2026 208,2026 208,1851 104,1851
no net on Top Layer "NONET_L01_P001" (solid, pour order 1): 3860,300
GND on Bottom Layer "GND_L02_P068" (solid, remove dead copper, pour order 68): 0,113.24 ccw(c100,113.24) 100,13.24 4503.92,13.24 ccw(c4503.92,20.32) 4511,20.32 4511,2900 ccw(c4475,2900) 4475,2936 4416,2936 ccw(c4411,2936) 4411,2941 0,2941

## Other copper
Top Layer:
Bottom Layer:
  pour cut-out: 2930.88,2477.12 2981.08,2426.92 2981.08,2430.31 3110.39,2559.61 3022,2648
  pour cut-out: 2480,2817 2697,2783 2723,2443 2859,2247 2871,2044 2518,2045 2172,2036 2135.9,2009.14 2050,2124 2336,2384
  pour cut-out: 1639,515 1705.91,666.09 1713,589 1678,506
  pour cut-out: 4446.95,317.21 4519,229 4511,345.33
  pour cut-out: 4460,416.36 4516,541 4513,375
  pour cut-out: 4460,748.57 4515,658 4511,778.4
  pour cut-out: 4460,849.43 4511,951 4514,806
  pour cut-out: 4317,1363 4352.31,1350.69 4339.56,1362.26
  pour cut-out: 4464.55,1425.34 4407.09,1357.91 4410,1401
  pour cut-out: 4320,1416 4383.63,1487.44 4385,1427 4333,1402
  pour cut-out: 4308.56,1746.26 4394.28,1662.42 4403,1769
  pour cut-out: 4469.69,1864.72 4471.44,1706.97 4429,1745 4434,1840
  pour cut-out: 4295,1855 4375.45,1903.75 4385,1844 4274,1845
  pour cut-out: 4153,1920 4129.31,1882.31 4114,1885
  pour cut-out: 4067.31,1944.31 4114.7,1979.62 4095,1942
  pour cut-out: 4233.31,2255.31 4184,2191 4123,2288 4172,2341
  pour cut-out: 4193.84,2433.25 4245.72,2349.55 4192,2334 4172,2341 4185.3,2417.09
  pour cut-out: 3955,2340.39 4104.61,2445 4129,2406 4120,2353 4045,2311 3988,2311
  pour cut-out: 4128.84,2623.25 4109.02,2551.13 4099,2598
  pour cut-out: 3956.37,2631.37 4066,2661 4066,2570 3943,2544
  pour cut-out: 3776,2563 3894.28,2639.55 3890,2547
  pour cut-out: 4101.75,1403.84 4195.39,1409.61 4133,1340
  pour cut-out: 3538.84,1021.75 3585,1158 3520,1113 3508,1053
  pour cut-out: 3455.69,987.31 3374,873 3375,1051 3514,1161
  pour cut-out: 3053.84,2336.75 3179,2519 3066,2506 3020,2373
  pour cut-out: 2966.16,2336.75 2996,2369 2983,2394
  pour cut-out: 2910,2809 2924.61,2500 3013.84,2488.25 3030,2721 3015.21,2818.62
  pour cut-out: 3682.69,2185.69 3769,1768 3385.94,1616.98 3340.2,1241.6 3089,1007 3077,1115 3257.85,1265.39 3253.42,2023.56 3446.07,2227.33
  pour cut-out: 2899,1283 3147,1189 3022,1101 2760,1113
  pour cut-out: 2712,1103 2760.91,975.91 2810,1102
  pour cut-out: 2542.09,312.91 2592,378 2547,353
  pour cut-out: 2487.31,384.31 2548,429 2511,376
  pour cut-out: 2543,630 2587.09,602.09 2550,601
  pour cut-out: 2522.91,537.91 2479,602 2516,583
  pour cut-out: 2443.84,1198.25 2492,1156 2400,1150
  pour cut-out: 2356.16,1198.25 2380.39,1130.39 2383,1196
  pour cut-out: 2286.91,1615.79 2203,1551 2198,1639
  pour cut-out: 1908,1598 1921.16,1568.25 1931,1594
  pour cut-out: 1945,1638 1976.75,1623.84 1952,1612
  pour cut-out: 2763.25,2106.16 2700,2128 2741,2140
  pour cut-out: 2712,2176 2775,2195.39 2736,2160
  pour cut-out: 2561,2207 2612,2170 2563,2157
  pour cut-out: 2402.09,2130.3 2511,2175 2487,2105
  pour cut-out: 2578.84,2463.25 2561,2385 2547,2442
  pour cut-out: 2495.69,2452.31 2507,2383 2522,2430
  pour cut-out: 2550,2664 2615,2644.61 2589,2676
  pour cut-out: 2536,2717 2603.25,2733.84 2589,2708
  pour cut-out: 2498,2670 2436,2575 2432,2677
  pour cut-out: 2239.96,2677.1 2306.24,2575.4 2335.32,2692.04
  pour cut-out: 2499,2816 2449,2708 2392,2719 2430,2830
  pour cut-out: 2247.56,2832.77 2284,2707 2353,2722 2386.21,2850.1
  pour cut-out: 1752,817 1787.31,805.69 1785,824
  pour cut-out: 1741,871 1810,890.39 1771,860
  pour cut-out: 1587.6,2096.57 1569.61,2025 1603.25,1981.16 1695,1984.61 1800,2117
  pour cut-out: 1320,2530.39 1570,2535.39 1570,2444.61 1320,2439.61
  pour cut-out: 1743.81,2618.43 1812,2636 1779.25,2636.08
  pour cut-out: 1743.81,2709.2 1810,2691 1779.25,2691.55
  pour cut-out: 1659.52,2818.71 1772.57,2820.43 1772.57,2719.57 1659.52,2721.29
  pour cut-out: 925,395 1669.69,520.31 1705.91,666.09 1777.31,656.69 1914.02,439.87 1826,165 925,295
  pour cut-out: 776.75,736.16 862,753 793,762
  pour cut-out: 776.75,823.84 862,807 790,803
  pour cut-out: 645,2826 646,2705 1062,2700 1063,2827
  pour cut-out: 407.31,584.69 328,653 375,595
  pour cut-out: 293,593 335.91,529.91 340,565
  pour cut-out: 321.46,1060.71 245,978 242,1069
  pour cut-out: 249,1212 311.02,1140.04 241,1124
  pour cut-out: 247,1501 299.05,1480.29 243,1392
  pour cut-out: 360,1649 336.43,1529 288,1575
  pour cut-out: 486,1771 661,1840 532,1858
  pour cut-out: 532,1987.09 632,1893 532,1878
  pour cut-out: 461.61,1981 440,1820 506,1869
  pour cut-out: 52,2066.5 -3,2012 -1,2110
  pour cut-out: 1,2124 52,2167.36 -4,2215
  pour cut-out: 65.05,2501.29 -2,2435 -2,2542
  pour cut-out: 65.05,2598.71 -2,2666 -1,2554

## Silkscreen, mask and mechanical layers (free items; w line width, h text height)
Top Overlay:
  text "Solar Cells" at 69,2297 h40
  text "IN+" at 300,2197 h60
  text "OUT+" at 188,1182 h60
  text "1" at 4460,750 h60
  text "IN+" at 4229,690 h60
  text "Lithium batteries" at 4144,453 h40
  text "VCC5" at 2149,211 h20
  text "VCC3.3" at 2417,163 h20
Mechanical 1:
  the board outline again, w7.87

## Dimensions
0,0 to 4527.56,0 on Mechanical 1
0,2952.76 to 0,0 on Mechanical 1

## Text inside footprints (layer, text, board x,y; h text height)
U2: Top Overlay "1" at 3675,430 h39.37 r270